# EAGLE board 2313 with DRT (EAGLE 6.1), part 1 of 2
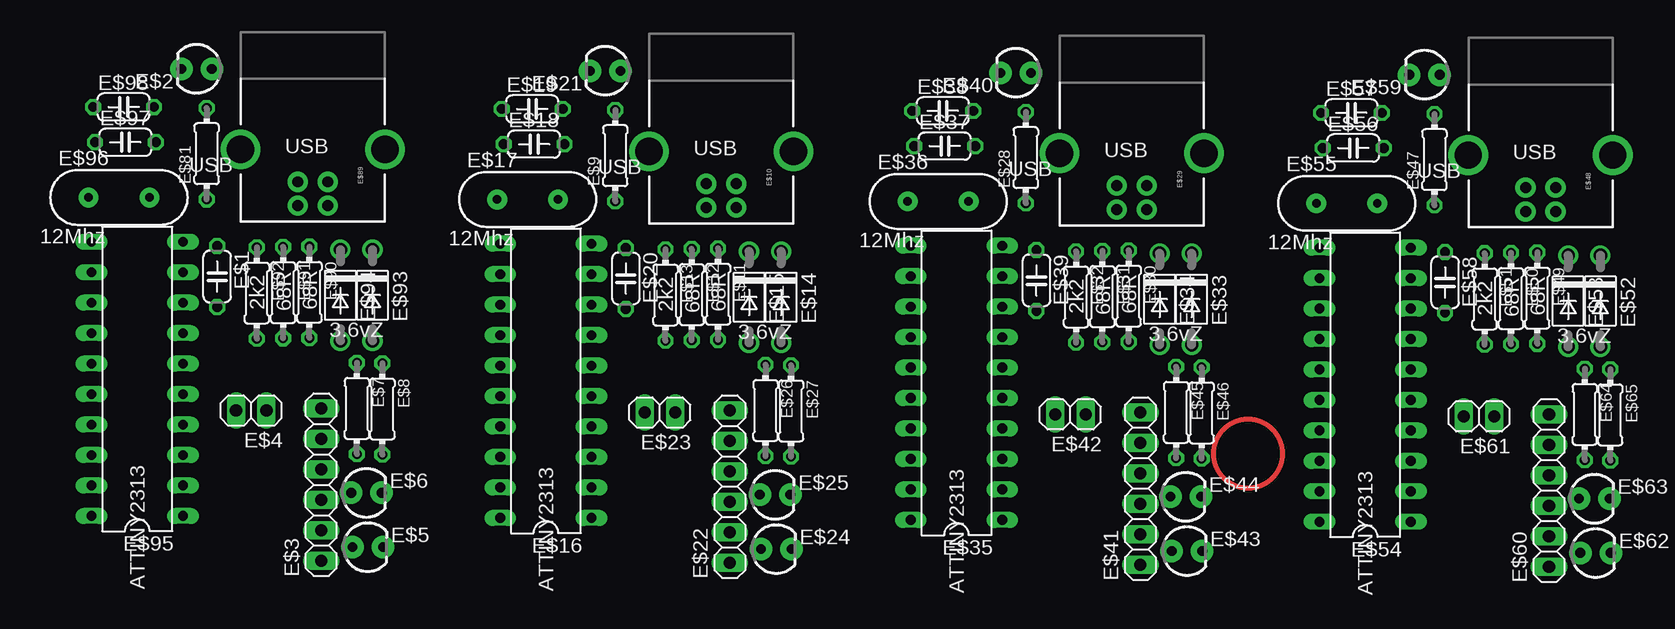
[diagram p0: board, top side]
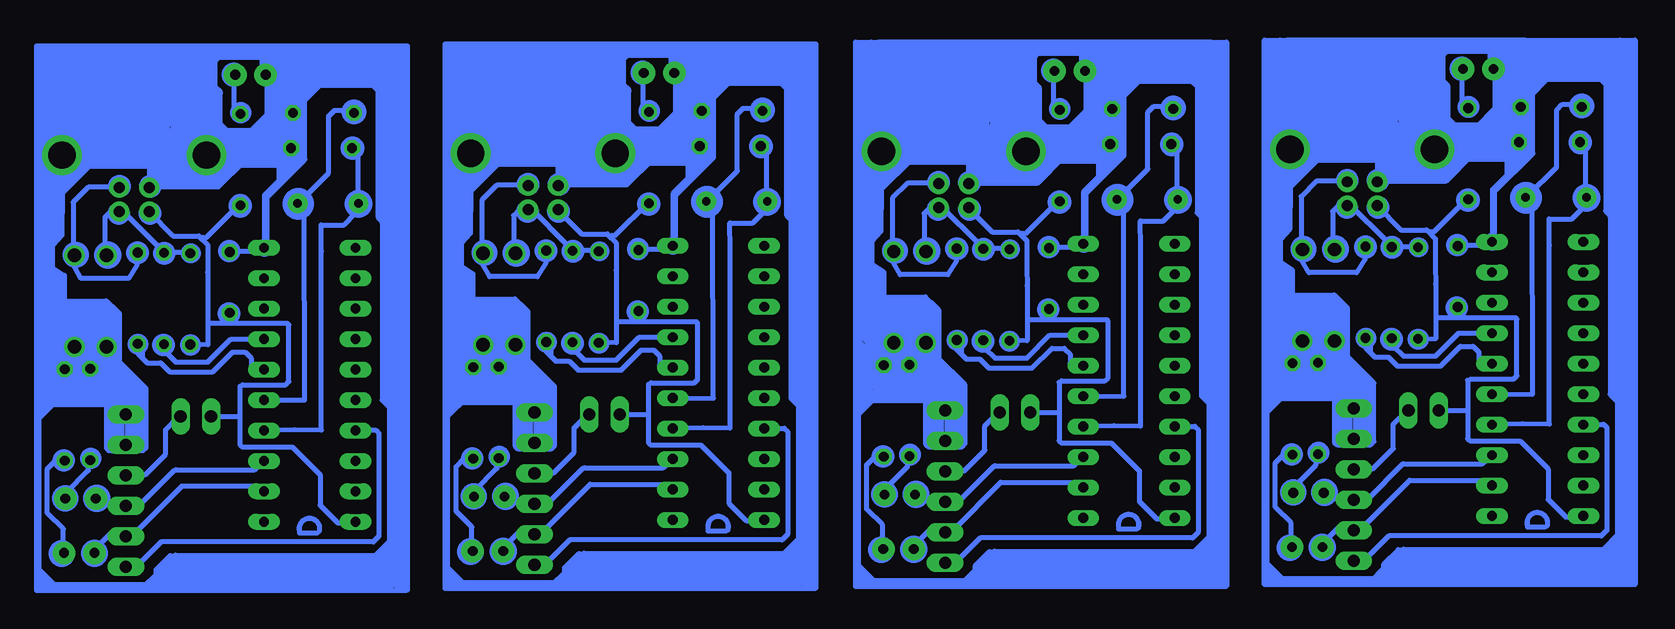
[diagram p1: board, bottom side, seen from below]

No outline drawn. Coordinates in mm, seen from the top.
Copper layers (1*16): Top 0.035mm / dielectric 1.5mm / Bottom 0.035mm
Design rules: minimum track width 10mil, minimum drill 24mil, track to track 8mil, track to pad 8mil, pad to pad 8mil, via to via 8mil, smd to smd 8mil, copper to edge 40mil, drill to drill 8mil, minimum pad ring 10mil, minimum via ring 8mil, stop-mask expansion 4mil, vias tented up to drill 0mil, thermal gap 10mil

## Footprints (pad centres in the part's own frame; a part is rotated, then mirrored left to right if it is on the bottom)
C050-024X044 = drill 0.813 octagon: 1 -2.54,0; 2 2.54,0
LED3MM = drill 0.813 pad 1.88: A -1.27,0; K 1.27,0
1X06 = drill 1.016 long: 1 -6.35,0; 2 -3.81,0; 3 -1.27,0; 4 1.27,0; 5 3.81,0; 6 6.35,0
1X02 = drill 1.016 long: 1 -1.27,0; 2 1.27,0
0204/7 = drill 0.813 octagon: 1 -3.81,0; 2 3.81,0
USB-B-PTH = drill 0.914 pad 1.676: D+ 0,1.25; D- 1.981,1.25; GND 0,-1.25; VBUS 1.981,-1.25 | drill 2.286: S1 -2.718,-6.02; S2 -2.718,6.02
DO41-7 = drill 1.118: A 3.81,0; C -3.81,0
DIL20 = drill 0.813 long: 1 -11.43,-3.81; 2 -8.89,-3.81; 3 -6.35,-3.81; 4 -3.81,-3.81; 5 -1.27,-3.81; 6 1.27,-3.81; 7 3.81,-3.81; 8 6.35,-3.81; 9 8.89,-3.81; 10 11.43,-3.81; 11 11.43,3.81; 12 8.89,3.81; 13 6.35,3.81; 14 3.81,3.81; 15 1.27,3.81; 16 -1.27,3.81; 17 -3.81,3.81; 18 -6.35,3.81; 19 -8.89,3.81; 20 -11.43,3.81
HC49US = drill 0.7 pad 1.651: 1 -2.54,0; 2 2.54,0

## Placement (x,y rotation side)
E$1  [C050-024X044]  16.87,27.66 270 top
E$2  [LED3MM]  15.15,44.98 180 top
E$3  [1X06]  25.53,10.31 90 top
E$4  [1X02]  19.7,16.49 180 top
E$5  [LED3MM]  29.41,5.1 0 top
E$6  [LED3MM]  29.3,9.63 0 top
E$7  68Rd-  [0204/7]  28.51,16.66 270 top
E$8  68Rd-  [0204/7]  30.63,16.62 270 top
E$9  2K2  [0204/7]  50.04,37.74 90 top
E$10  [USB-B-PTH]  58.87,35.39 270 top
E$11  68RD+  [0204/7]  58.6,26.19 270 top
E$12  68Rd-  [0204/7]  56.41,26.16 270 top
E$13  2K2  [0204/7]  54.22,26.12 270 top
E$14  [DO41-7]  63.86,25.94 270 top
E$15  [DO41-7]  61.18,25.94 270 top
E$16  [DIL20]  44.26,18.96 90 top
E$17  [HC49US]  42.73,34.09 0 top
E$18  [C050-024X044]  43.27,38.7 0 top
E$19  [C050-024X044]  43.12,41.64 0 top
E$20  [C050-024X044]  50.92,27.5 270 top
E$21  [LED3MM]  49.2,44.81 180 top
E$22  [1X06]  59.58,10.14 90 top
E$23  [1X02]  53.76,16.33 180 top
E$24  [LED3MM]  63.46,4.94 0 top
E$25  [LED3MM]  63.36,9.47 0 top
E$26  68Rd-  [0204/7]  62.56,16.49 270 top
E$27  68Rd-  [0204/7]  64.69,16.45 270 top
E$28  2K2  [0204/7]  84.26,37.58 90 top
E$29  [USB-B-PTH]  93.09,35.23 270 top
E$30  68RD+  [0204/7]  92.82,26.02 270 top
E$31  68Rd-  [0204/7]  90.63,25.99 270 top
E$32  2K2  [0204/7]  88.44,25.96 270 top
E$33  [DO41-7]  98.08,25.77 270 top
E$34  [DO41-7]  95.4,25.77 270 top
E$35  [DIL20]  78.47,18.8 90 top
E$36  [HC49US]  76.95,33.93 0 top
E$37  [C050-024X044]  77.49,38.54 0 top
E$38  [C050-024X044]  77.33,41.48 0 top
E$39  [C050-024X044]  85.14,27.34 270 top
E$40  [LED3MM]  83.42,44.65 180 top
E$41  [1X06]  93.8,9.98 90 top
E$42  [1X02]  87.97,16.16 180 top
E$43  [LED3MM]  97.68,4.78 0 top
E$44  [LED3MM]  97.57,9.31 0 top
E$45  68Rd-  [0204/7]  96.78,16.33 270 top
E$46  68Rd-  [0204/7]  98.9,16.29 270 top
E$47  2K2  [0204/7]  118.31,37.41 90 top
E$48  [USB-B-PTH]  127.14,35.07 270 top
E$49  68RD+  [0204/7]  126.87,25.86 270 top
E$50  68Rd-  [0204/7]  124.68,25.83 270 top
E$51  2K2  [0204/7]  122.49,25.8 270 top
E$52  [DO41-7]  132.13,25.61 270 top
E$53  [DO41-7]  129.45,25.61 270 top
E$54  [DIL20]  112.53,18.64 90 top
E$55  [HC49US]  111,33.76 0 top
E$56  [C050-024X044]  111.54,38.38 0 top
E$57  [C050-024X044]  111.39,41.31 0 top
E$58  [C050-024X044]  119.19,27.17 270 top
E$59  [LED3MM]  117.47,44.49 180 top
E$60  [1X06]  127.85,9.82 90 top
E$61  [1X02]  122.03,16 180 top
E$62  [LED3MM]  131.73,4.61 0 top
E$63  [LED3MM]  131.63,9.14 0 top
E$64  68Rd-  [0204/7]  130.83,16.17 270 top
E$65  68Rd-  [0204/7]  132.96,16.13 270 top
E$81  2K2  [0204/7]  15.99,37.9 90 top
E$89  [USB-B-PTH]  24.82,35.56 270 top
E$90  68RD+  [0204/7]  24.55,26.35 270 top
E$91  68Rd-  [0204/7]  22.36,26.32 270 top
E$92  2K2  [0204/7]  20.17,26.29 270 top
E$93  [DO41-7]  29.81,26.1 270 top
E$94  [DO41-7]  27.13,26.1 270 top
E$95  [DIL20]  10.21,19.13 90 top
E$96  [HC49US]  8.68,34.25 0 top
E$97  [C050-024X044]  9.22,38.87 0 top
E$98  [C050-024X044]  9.06,41.8 0 top

## Library data of the parts
E$1 E$7-E$9 E$11-E$13 E$18-E$20 E$26-E$28 E$30-E$32 E$37-E$39 E$45-E$47 E$49-E$51 E$56-E$58 E$64 E$65 E$81 E$90-E$92 E$97 E$98 = rcl
E$2 E$5 E$6 E$21 E$24 E$25 E$40 E$43 E$44 E$59 E$62 E$63 = SparkFun-LED
E$3 E$4 E$22 E$23 E$41 E$42 E$60 E$61 = pinhead
E$10 E$29 E$48 E$89 = SparkFun-Connectors
E$14 E$15 E$33 E$34 E$52 E$53 E$93 E$94 = ref-packages-longpad
E$16 E$35 E$54 E$95 = 40xx
E$17 E$36 E$55 E$96 = SparkFun-FreqCtrl

## Nets
S$133: E$16.5
S$185: E$95.5
S$274: E$35.5
S$402: E$54.5

## Tracks (layer width: path | path; a pad name or v marks a point on that pad's centre or on a via)
S$1
  Bottom 0.406: 22.23,22.41 22.23,21.88 21.37,21.02 18.7,21.02 16.79,22.93 14.02,22.93 13.98,22.9
S$2
  Bottom 0.406: 24.52,22.48 24.52,21.7 23.77,20.95 22.64,20.95 21.89,20.2 18.29,20.2 16.64,21.85 15.59,21.85 15.1,21.36 15.1,20.61 14.88,20.38 14.13,20.38 14.05,20.46
S$3
  Bottom 0.406: 24.18,21.98 24.18,21.35
S$4
  Bottom 0.406: 12.04,24.22 18.61,24.22 18.65,24.16
S$5
  Bottom 0.406: 15.81,19.12 12.21,19.12 11.95,19.39 11.95,24.12 12.03,24.21
S$6
  Bottom 0.406: 15.82,13.94 11.66,13.94 9.34,11.62 9.34,9.07 7.88,7.62 6.53,7.62 6.37,7.78
S$7
  Bottom 0.406: 16.04,19.03 16.04,14.12 15.93,14.02
S$8
  Bottom 0.406: 16.91,25.16 16.91,24.32
S$9
  Bottom 0.406: 16.97,30.22 16.72,30.22
S$10
  Bottom 0.406: 16.75,30.29 14.37,30.29 13.96,30.69 13.96,34.93 11.08,37.81
S$11
  Bottom 0.406: 19.09,31.41 18.83,31.41 15.99,34.25
S$12
  Bottom 0.406: 16.53,45.11 16.53,42.26 15.97,41.7
S$13
  Bottom 0.406: 13.79,45 13.79,39.71 15.93,37.57
S$14
  Bottom 0.406: 32.92,22.36 32.92,46.17 31.68,47.4
S$15
  Bottom 0.406: 26.55,21.95 26.55,20.98 27.36,20.17 31.61,20.17 32.93,21.49 32.95,23.65 32.93,23.65
S$16
  Bottom 0.406: 29.08,21.96 27.94,21.96 27.87,21.89
S$17
  Bottom 0.406: 29.08,21.64 27.55,21.64 27.53,21.66
S$18
  Bottom 0.406: 30.08,21.28 27.15,21.28 27.11,21.31
S$19
  Bottom 0.406: 26.75,21.19 26.75,21.17 27.51,20.41
S$20
  Bottom 0.406: 27.09,21.02 30.18,21.02 30.64,21.48
S$21
  Bottom 0.406: 27.38,20.75 30.35,20.75 30.93,21.33
S$22
  Bottom 0.406: 27.6,20.46 30.51,20.46 31.14,21.09
S$23
  Bottom 0.406: 30.58,20.34 31.23,20.34 32.62,21.73 32.16,21.73 31.02,20.59 31.02,21.51 30.78,21.75 30.8,21.75 31.32,21.22 31.32,21.51 30.87,21.96 31.03,21.96 31.54,21.46 32.08,21.46 32.64,22.02 31.94,22.02 31.56,21.64 31.92,21.64 32.64,22.36 32.64,22.63 32.7,22.69 32.39,22.69 31.54,21.84 | 31.54,21.84 | 31.54,21.84 30.66,22.72 | 30.66,22.72 | 30.66,22.72 30,23.37 32.57,23.37 32.66,23.46 32.66,22.98 32.68,22.96 30.6,22.96 30.55,23.01 31.83,23.01 32.21,22.63 31.65,22.63 31.49,22.8 31.14,22.8 31.07,22.72 31.11,22.72 31.5,22.32 31.61,22.32 31.63,22.31 31.63,22.34 31.78,22.49
S$24
  Bottom 0.406: 26.53,21.22 26.53,23.19 26.79,23.45 29.97,23.45 30.13,23.61 30.13,24.53 29.99,24.68 29.99,24.5 29.97,24.48 29.97,23.3 29.8,23.14 27.47,23.14 27.36,23.03 29.8,23.03 29.84,22.99 28.81,22.99 28.68,22.87 28.2,22.87 28.11,22.78 28.72,22.78 28.77,22.72 28.59,22.72 28.47,22.6 28.3,22.6 28.29,22.61 28.3,22.61 28.39,22.52 28.79,22.52 28.81,22.51 28.18,22.51 28.16,22.52 28.14,22.52 28.11,22.49
S$25
  Bottom 0.406: 30.44,23.27 30.44,24.74 30.18,25 30.97,25.79 30.78,25.79 29.8,24.81 30.29,24.81 30.82,25.34 30.82,25.41 31.12,25.71 31.12,25.3 31,25.19 31,24.77 30.67,24.43 30.67,25.3 30.97,25.6 30.97,25.07 30.78,24.89 30.78,23.8 | 30.78,23.46 30.78,23.8 | 30.78,23.8 31,24.02 31,24.7 31.3,25 31.3,23.76 31.08,23.54 31.08,24.25 31.04,24.29
  Bottom 1.016: 31.04,24.29 31.04,24.25 31.68,23.61 32.39,23.61 32.39,29.05 | 32.39,36.11 32.39,29.05 | 32.39,29.05 31.23,27.89 31.23,24.32 31.15,24.25 31.6,24.25 31.64,24.21 31.64,28.04 31.9,28.3 31.9,31.27 31.34,31.83 31.34,35.47 30.89,35.92 31.34,35.92 32.5,37.08 32.5,36.29 31.83,35.62 31.83,35.73 31.23,36.33 30.14,36.33 28.83,37.64 23.24,37.64 23.05,37.46 23.05,36.56 22.72,36.22 18.11,36.22 14.24,40.08 14.24,40.68 14.13,40.8 14.13,40.72 14.84,40.01 17.2,40.01 17.95,40.76 17.95,43.46 18.37,43.87 18.37,46.24 17.88,46.73 14.02,46.73 13.9,46.61 13.9,45.04 13.87,45 13.79,45 13.42,44.62 13.42,39.74 14.73,38.43 12.55,38.43 | 11.73,38.43 12.55,38.43 | 12.55,38.43 13.23,39.11 13.23,39.26 12.48,40.01 12.48,44.96 13.15,45.64 13.15,46.5 13.53,46.88
S$26
  Bottom 1.016: 16.9,37.38 16.9,39.11 18.18,40.38 19.71,40.38 20.8,39.3 20.8,37.31 19.9,36.41 21.1,36.41 21.74,37.04 21.74,39.9 20.43,41.21 20.43,40.38 21.25,39.56 21.25,39.82 20.17,40.91 18.25,40.91 18.22,40.95 18.22,41.43 18.48,41.7 20.92,41.7 21.33,41.28 21.33,37.91 22.38,36.86 22.38,40.83 21.55,41.66 19.6,41.66 18.59,42.67 18.59,46.88 18.4,47.06 31.15,47.06 32.47,45.75 32.47,37.42 32.39,37.34 32.32,37.34 31.49,36.52 30.29,36.52 29.2,37.61 29.2,39.07 29.95,39.82 31.57,39.82 32.24,39.15
S$27
  Bottom 1.016: 28.72,38.24 22.68,38.24 22.6,38.32
S$28
  Bottom 1.016: 28.79,38.88 23.32,38.88 23.2,38.99 23.2,41.02 22.27,41.96 19.9,41.96 19.27,42.6 19.27,46.31 19.3,46.35 30.85,46.35 31.87,45.34 31.87,40.5 29.58,40.5 28.83,39.75 23.32,39.75 23.24,39.82
S$29
  Bottom 1.016: 29.69,40.35 22.57,40.35 22.34,40.57
S$30
  Bottom 1.016: 31.72,41.13 23.62,41.13
S$31
  Bottom 1.016: 31.57,41.85 22.08,41.85 22.04,41.81
S$32
  Bottom 1.016: 31.68,42.56 19.79,42.56 19.72,42.63
S$33
  Bottom 1.016: 31.72,43.27 19.38,43.27 19.23,43.42
S$34
  Bottom 1.016: 32.13,44.25 19.53,44.25 19.38,44.1
S$35
  Bottom 1.016: 31.72,45 19.94,45 19.72,44.77
S$36
  Bottom 1.016: 31.19,45.56 19.27,45.56 19.19,45.49
S$37
  Bottom 1.016: 16.75,39.22 14.28,39.22 14.2,39.15
S$38
  Bottom 1.016: 12.31,46.01 12.64,46.01 12.47,46.17
S$39
  Bottom 0.406: 30.92,26.12 27.17,26.12 26.08,25.03 26.08,20.73 26.68,20.13 31.52,20.13 32.74,21.36
S$40
  Bottom 0.406: 26.83,20.32 26.83,20.47 26.42,20.89 26.42,21.57 26.34,21.64 26.34,24.87 27.33,25.86 30.3,25.86 30.45,26.02 30.32,26.02 29.72,25.42 29.72,25.32 29.59,25.19 29.59,24.64 29.44,24.48 29.44,23.81 29.39,23.75 29.31,23.75 29.25,23.7 26.75,23.7 26.73,23.68 26.73,24.82 26.68,24.87 26.75,24.87 27.48,25.6 29.39,25.6 29.59,25.39 29.59,24.27 29.25,23.94 27.07,23.94 26.94,24.07 26.94,24.56 27.77,25.39 29.25,25.39 29.33,25.32 29.33,24.41 29.28,24.35 29.05,24.35 28.94,24.25 27.38,24.25 27.3,24.33 27.3,24.14 27.2,24.14 27.15,24.09 27.15,24.33 27.46,24.64 27.46,24.82 27.8,25.16 27.85,25.16 27.93,25.24 28.16,25.24 28.21,25.19 29.12,25.19 29.2,25.11 29.2,25.03 29.15,24.98 29.15,24.59 29.1,24.54 28.76,24.54 28.73,24.56 27.98,24.56 27.9,24.48 27.64,24.48 27.59,24.43 27.59,24.69 27.67,24.77 27.85,24.77 27.98,24.9 28.06,24.9 28.16,25 28.34,25 28.45,24.9 29.49,24.9 29.52,24.93 28.68,24.93 28.55,24.8 28.06,24.8 28,24.85 28,24.69
S$41
  Bottom 0.406: 6.46,15.34 4.71,15.34 4.44,15.07 4.44,6.49 4.9,6.03 22.6,6.03 24.68,3.94 26.57,3.94 26.69,3.83
S$42
  Bottom 0.406: 19.68,47.4 12.71,47.4 11.85,46.54 11.85,41.28 11.4,40.83
S$43
  Bottom 0.406: 12.22,42.78 12.22,45.86 12.15,45.94 12.15,46.46 12.82,47.14 13.01,47.14 13.16,47.29
S$44
  Bottom 0.406: 12.73,36.02 12.73,47.18 12.95,47.4 11.26,47.4 11.15,47.29 11.15,46.91 | 11.15,38.12 11.15,37.85 10.99,37.69 10.85,37.69 10.61,37.93 10.61,46.77 11.21,47.37 11.81,47.37 12.02,47.15 11.97,47.15 11.7,46.88 11.51,46.88 11.42,46.96 11.89,46.96 11.94,47.02 11.89,47.02 11.86,46.99 11.8,46.99 11.51,46.69 11.51,39.11 11.81,39.11 11.81,39.95 11.56,40.2 11.62,40.2 11.81,40.39 11.81,40.14 12.08,39.87 12.08,39.68 12.21,39.54 11.91,39.54 11.86,39.49 11.86,38.81 10.9,37.85 10.9,46.66 11.15,46.91 | 11.15,46.91 11.15,38.12 | 11.15,38.12 12.57,36.71 12.57,37.82 12.43,37.96 11.8,37.96 11.64,37.8 12.02,37.8 12.35,37.47 12.35,37.63 12.32,37.66 12.32,37.61 12.19,37.47 12.19,37.06 12.27,36.98 12.27,37.39 12.3,37.41 12.3,37.44
S$45
  Bottom 1.016: 11.39,38.36 11.77,38.73 11.88,38.73 12.33,39.18
S$46
  Bottom 0.406: 6.18,34.27 6.18,38.36 6.63,38.82
S$47
  Bottom 0.406: 10.65,40.2 12.6,42.15
S$48
  Bottom 0.406: 15.67,39.52 15.67,39.75 13.35,42.07
S$49
  Bottom 0.406: 13.76,30.55 13.76,34.77 10.66,37.87
S$50
  Bottom 0.406: 26.67,13.79 26.67,20.82 28.14,20.82
S$51
  Bottom 0.406: 18.39,16.49 16.17,16.49 16.13,16.46
S$53
  Bottom 1.016: 11.77,40.76 11.66,40.66
S$54
  Bottom 0.406: 11.09,34.37 11.05,34.37 8.63,36.79 8.63,41.53 8.14,42.02 6.7,42.02 6.54,41.86
S$55
  Bottom 0.406: 26.67,9.1 24.38,9.1 21.45,12.03
S$56
  Bottom 0.406: 26.59,6.65 24.87,6.65 20.88,10.64
S$57
  Bottom 0.406: 32.86,1.99 2.11,1.99
S$58
  Bottom 0.406: 15.6,37.86 17.82,35.64 23.86,35.64
S$59
  Bottom 0.406: 10.79,42.19 10.79,42.71 9.39,44.12 4.96,44.12 4.54,43.69 4.54,33.12 3.88,32.47 2.57,32.47 2.31,32.73 2.31,46.38 3.13,47.2
S$60
  Bottom 0.406: 13.02,47.39 3.36,47.39 2.54,46.57
S$61
  Bottom 0.406: 31.88,35.34 31.88,31.02 32.15,30.74
S$62
  Bottom 0.406: 2.1,2.11 2.08,46.12 3.24,47.28 10.01,47.28 10.26,47.03
S$63
  Bottom 0.406: 3.67,33.46 3.67,33.13 2.15,31.61 2.15,32.07 2.42,32.34 2.5,32.34
S$64
  Bottom 0.406: 32.98,1.96 32.98,47.39 2.08,47.39 2.08,2
S$65
  Bottom 0.406: 21.41,4.93 4.66,4.9 3.52,6.04 3.52,18.21 3.56,18.25
S$66
  Bottom 0.406: 29.28,17.62 28.53,18.37 26.88,18.37 26.84,18.33 26.84,19.78 27,19.94 30.18,19.94 30.26,19.86
S$67
  Bottom 0.406: 4.17,32.65 4.17,17.85 2.13,15.8
S$68
  Bottom 0.406: 2.22,16.07 2.22,16.29 3.91,17.98 3.91,32.1 3.78,32.23 3.78,18.21 2.34,16.77 2.34,31.36 3.15,32.18 3.42,32.18 3.47,32.12 3.47,18.09 2.68,17.3 2.68,31.29 3.25,31.86 3.25,17.77 2.96,17.49 2.96,18.02 3.02,18.07 3.02,31.65 2.87,31.8
S$69
  Bottom 1.422: 2.74,32.17 2.74,46.76 2.69,46.8 2.69,34.22 3.7,33.21 3.7,46.22 3.4,46.52 10.26,46.52 10.39,46.65 10.39,44.02 10.55,43.87 10.55,43.88 9.74,44.69 4.68,44.69 4.38,44.39 4.38,45.16 4.63,45.41 9.99,45.41 10.15,45.57
S$70
  Bottom 1.422: 16.39,39.11 16.39,37.97 16.42,37.94 12.6,37.94 12.54,38
S$71
  Bottom 0.406: 32.74,43.39 32.74,21.94 32.95,21.73
S$72
  Bottom 1.27: 2.66,2.53 2.66,19.52 2.8,19.65 2.8,17.69 2.99,17.5 2.99,5.83 4.52,4.3 20.13,4.3 20.54,3.89 4.14,3.89 3.59,4.44 3.59,3.65 3.4,3.46 21.22,3.46 21.27,3.51
S$74
  Bottom 0.406: 24.61,2.3 24.04,2.3 23.02,3.33 23.02,3.7 21.84,4.88 4.75,4.88 3.39,6.24 3.39,2.3 23.78,2.3 23.85,2.38 23.59,2.38 22.68,3.29 22.68,3.7 21.77,4.61 20.93,4.61 20.89,4.65 20.89,4.54 21.12,4.31 21.73,4.31 22.45,3.59 22.45,3.37 23.13,2.68 21.65,4.16 21.65,3.86 22.94,2.57 3.65,2.57 3.46,2.38 21.08,2.38 21.92,3.21 22.22,2.91 21.84,2.91 21.8,2.87 22.14,2.87 22.18,2.83 22.41,2.83 22.41,2.87 21.69,2.87 21.35,3.21
S$75
  Bottom 0.406: 28.14,5.07 28.14,5.37 26.82,6.7
S$76
  Bottom 0.61: 30.09,18.1 29.04,19.15 27.73,19.15 27.63,19.25 31.73,19.25 32.25,19.77
S$77
  Bottom 0.61: 26.71,13.95 26.71,21.41
S$79
  Bottom 0.406: 20.9,10.67 14.19,10.67 13.91,10.39
S$80
  Bottom 0.406: 21.37,12.04 14.81,12.04 14.05,12.79
S$81
  Bottom 0.406: 32.66,45.06 32.66,47.22 32.62,47.26 32.47,47.26 32.35,47.14 32.51,47.14 32.7,46.95
S$82
  Bottom 0.406: 31.91,43.06 31.56,43.06 31.21,43.41
S$84
  Bottom 0.406: 26.89,13.63 24.12,13.63 23.85,13.9 23.85,18.78 26.21,21.14 26.21,20.68 24.23,18.71 24.23,14.01 24.31,13.94 24.31,18.37 25.83,19.89 25.87,19.89 26.02,20.04 26.02,19.62 24.61,18.22 24.99,18.22 25.98,19.2 25.9,19.2 24.46,17.76 24.84,17.76 25.98,18.9 25.98,18.45 25.6,18.07 25.11,18.07 24.92,17.88 25.11,17.88 | 25.11,17.88 25.14,17.88 25.37,17.65 26.17,17.65 26.25,17.73 25.71,17.73 | 25.64,17.73 24.61,17.73 24.54,17.8 24.57,17.8 24.73,17.65 24.92,17.65 25.03,17.54 25.6,17.54 25.94,17.88 25.9,17.88 25.87,17.91 25.07,17.91 24.65,17.5 24.65,17.23 24.57,17.16 24.57,14.01 24.69,13.9 25.71,13.9 25.83,14.01 25.83,17.61 25.71,17.73 | 25.71,17.73 25.64,17.73 | 25.64,17.73 25.41,17.5 25.41,14.12 25.14,14.12 25.11,14.09 25.11,17.69 | 25.11,17.88 25.11,17.69 | 25.11,17.69 24.77,17.35 24.77,14.24 24.95,14.05
S$85
  Bottom 0.406: 27.13,13.83 27.13,18.85 27.38,19.1
S$86
  Bottom 0.406: 26.04,13.65 26.06,13.65 | 26.06,13.65 26.97,13.65 27.11,13.79 | 26.06,13.65 26.06,25.04 26.67,25.65
S$87
  Bottom 0.406: 26.29,20.65 26.29,13.88 26.31,13.86
S$88
  Bottom 0.406: 24.78,11.58 26.58,11.58 26.71,11.45
S$89
  Bottom 0.406: 24.68,2.03 23.92,2.42
S$90
  Bottom 0.406: 9.42,6.86 arc-215 11.05,6.88
S$91
  Bottom 0.406: 24.8,2.3 28.46,2.3
S$92
  Bottom 0.406: 32.47,2.45 32.47,2.49 23.74,2.49
S$93
  Bottom 0.61: 29.63,17.81 28.68,18.76 27.24,18.76 27.11,18.89 27.11,19.51 27.24,19.64 31.53,19.64 32.54,20.66 32.54,20.85 32.64,20.95
S$94
  Bottom 0.61: 30.61,18.2 30.28,18.53 30.74,18.53 31,18.27
S$95
  Bottom 0.406: 25.94,2.34 25.94,2.3 32.51,2.3
S$96
  Bottom 0.61: 31.2,18.36 30.84,18.72
S$97
  Bottom 0.406: 26.78,13.86 26.78,13.78
S$98
  Bottom 0.61: 31.69,18.92 31.99,19.21 30.18,19.21 29.79,18.82 31.36,18.82 31.46,18.72
S$99
  Bottom 0.406: 26.7,14.05 26.7,14.09
S$100
  Bottom 0.406: 26.66,14.58 26.66,14.43
S$101
  Bottom 0.406: 26.63,13.59 26.63,13.67
S$102
  Bottom 0.406: 31.71,18.18 31.71,17.8 27.16,17.8 27.16,17.73 | 31.71,18.18 31.71,20.34 31.86,20.34 | 27.12,18.1 27.12,18.18 31.71,18.18
S$103
  Bottom 0.406: 26.78,17.5 26.78,17.46 32.13,17.46
S$104
  Bottom 0.406: 28.07,9.65 27.35,9.65 26.82,9.12
S$105
  Bottom 0.406: 30.51,9.71 30.51,10.13 28.66,11.97 28.66,12.74 28.5,12.89
S$106
  Bottom 0.406: 32.75,2.37 32.75,16.37 31.11,18
S$107
  Bottom 0.61: 32.64,2.39 32.61,2.36
S$108
  Bottom 0.406: 32.72,16.79 32.72,21.4 32.75,21.42
S$109
  Bottom 0.406: 32.46,16.95 32.46,21.21 32.41,21.27
S$110
  Bottom 0.406: 32.19,17.26 32.19,19.45
S$111
  Bottom 0.406: 31.88,17.68 31.88,20.87 31.9,20.9
S$112
  Bottom 0.406: 30.75,5.16 30.75,7.1 32.06,8.42 32.06,12.13 31.32,12.87 30.69,12.87 30.61,12.79
S$113
  Bottom 0.406: 24.8,11.62 23.93,11.62 22.22,13.33 22.22,15.37 21.04,16.55
S$114
  Bottom 0.406: 26.51,23.48 26.89,23.48 26.93,23.52
S$115
  Bottom 0.406: 9.59,6.75 11.07,6.75
S$116
  Bottom 0.406: 21.55,2.7 3.93,2.7 3.38,3.25 19.23,3.25 20.73,4.75
S$117
  Bottom 0.406: 30.79,2.2 31.25,2.2 32.7,3.66
S$118
  Bottom 0.406: 32.7,3.29 32.65,3.29 31.93,2.57
S$119
  Bottom 0.406: 32.06,2.57 32.24,2.57 32.65,2.98
S$120
  Bottom 0.406: 60.07,35.45 62.71,35.45 63.97,34.18 63.97,29.82 63.86,29.71
S$121
  Bottom 0.406: 60.09,33.39 60.84,33.42 61.33,32.92 61.33,29.94 61.18,29.79
S$122
  Bottom 0.406: 54.18,29.98 56.32,29.98 56.36,30.02 56.63,30.24 60.03,33.64
S$123
  Bottom 0.406: 58.66,29.82 58.66,28.91 59.35,27.82 63.32,27.82 63.86,28.75 63.86,29.56 63.78,29.63
S$124
  Bottom 0.406: 57.69,33.4 55.67,31.38 53.51,31.38 52.77,30.64 52.77,28.35 52.75,26.9 52.75,22.31 54.29,22.25
S$125
  Bottom 0.406: 57.59,35.46 57.59,37.07 57.87,37.34 62.51,37.34 64.89,34.96 64.93,31.44 65.72,30.58 65.72,28.75 64.71,28.07 64.71,25.69 63.75,24.72 63.75,22.25 63.98,22.02
S$126
  Bottom 0.406: 61.22,22.06 63.7,22.06 63.79,21.97
S$127
  Bottom 0.406: 63.01,21.92 62.92,22.02
S$128
  Bottom 0.406: 58.64,22.1 58.41,22.33
S$129
  Bottom 0.406: 58.66,21.91 58.66,21.62
S$130
  Bottom 0.406: 56.25,22.2 56.25,22.07
S$131
  Bottom 0.406: 58.23,21.82 58.23,21.18
S$132
  Bottom 0.406: 49.66,37.7 51.88,35.47 57.91,35.47
S$133
  Bottom 0.406: E$16.5 46.8,17.69 44.69,17.68 44.71,34.24 45.21,34.2
S$134
  Bottom 0.406: 26.02,35.61 28.66,35.61 29.92,34.35 29.92,29.99 29.81,29.87
S$135
  Bottom 0.406: 26.04,33.55 26.78,33.58 27.28,33.09 27.28,30.1 27.13,29.95
S$136
  Bottom 0.406: 20.13,30.14 22.27,30.14 22.31,30.18 22.58,30.4 25.98,33.8
S$137
  Bottom 0.406: 24.6,29.99 24.6,29.07 25.29,27.98 29.27,27.98 29.81,28.92 29.81,29.72 29.73,29.8
S$138
  Bottom 0.406: 23.63,33.56 21.61,31.54 19.45,31.54 18.72,30.81 18.72,28.51 18.7,27.06 18.7,22.47 20.24,22.41
S$139
  Bottom 0.406: 23.54,35.62 23.54,37.23 23.82,37.51 28.46,37.51 30.84,35.12 30.87,31.6 31.67,30.75 31.67,28.91 30.66,28.24 30.66,25.85 29.69,24.89 29.69,22.41 29.92,22.18
S$140
  Bottom 0.406: 48.04,15.18 45.53,15.24 43.29,15.19 43.29,30.11 43.31,32.3 41.4,32.3 40.45,33.25 40.45,33.88 40.13,34.2
S$141
  Bottom 0.406: 56.28,22.25 56.28,21.72 55.42,20.86 52.76,20.86 50.84,22.77 48.07,22.77 48.03,22.73
S$142
  Bottom 0.406: 58.57,22.32 58.57,21.53 57.82,20.78 56.7,20.78 55.94,20.03 52.34,20.03 50.69,21.68 49.64,21.68 49.16,21.2 49.16,20.44 48.93,20.22 48.18,20.22 48.11,20.29
S$143
  Bottom 0.406: 46.09,24.05 52.66,24.05 52.7,24
S$144
  Bottom 0.406: 49.86,18.96 46.26,18.96 46,19.22 46,23.95 46.09,24.04
S$145
  Bottom 0.406: 49.87,13.78 45.72,13.78 43.39,11.46 43.39,8.91 41.93,7.45 40.58,7.45 40.42,7.62
S$146
  Bottom 0.406: 50.09,18.86 50.09,13.96 49.98,13.85
S$147
  Bottom 0.406: 50.96,25 50.96,24.15
S$148
  Bottom 0.406: 51.02,30.06 50.77,30.06
S$149
  Bottom 0.406: 50.81,30.12 48.42,30.12 48.02,30.53 48.02,34.76 45.13,37.65
S$150
  Bottom 0.406: 53.15,31.25 52.88,31.25 50.04,34.09
S$151
  Bottom 0.406: 50.58,44.95 50.58,42.1 50.02,41.53
S$152
  Bottom 0.406: 47.84,44.84 47.84,39.54 49.98,37.41
S$153
  Bottom 0.406: 66.97,22.19 66.97,46.01 65.74,47.24
S$154
  Bottom 0.406: 60.61,21.79 60.61,20.82 61.42,20.01 65.66,20.01 66.98,21.32 67,23.49 66.98,23.49
S$155
  Bottom 0.406: 63.13,21.8 62,21.8 61.92,21.73
S$156
  Bottom 0.406: 63.13,21.48 61.6,21.48 61.58,21.49
S$157
  Bottom 0.406: 64.13,21.11 61.2,21.11 61.16,21.15
S$158
  Bottom 0.406: 60.8,21.02 60.8,21 61.56,20.25
S$159
  Bottom 0.406: 61.15,20.86 64.24,20.86 64.69,21.31
S$160
  Bottom 0.406: 61.44,20.59 64.4,20.59 64.98,21.17
S$161
  Bottom 0.406: 27.17,22.23 29.65,22.23 29.74,22.13
S$162
  Bottom 0.406: 28.96,22.09 28.87,22.18
S$163
  Bottom 0.406: 61.65,20.3 64.56,20.3 65.2,20.93
S$164
  Bottom 0.406: 64.64,20.17 65.29,20.17 66.68,21.57 66.21,21.57 65.07,20.43 65.07,21.35 64.83,21.58 64.85,21.58 65.38,21.06 65.38,21.35 64.92,21.8 65.09,21.8 65.59,21.29 66.14,21.29 66.7,21.85 65.99,21.85 65.61,21.48 65.97,21.48 66.7,22.2 66.7,22.47 66.75,22.52 66.44,22.52 65.59,21.67 | 65.59,21.67 | 65.59,21.67 64.71,22.56 | 64.71,22.56 | 64.71,22.56 64.06,23.21 66.62,23.21 66.71,23.3 66.71,22.81 66.73,22.8 64.65,22.8 64.6,22.85 65.88,22.85 66.26,22.47 65.7,22.47 65.54,22.63 65.2,22.63 65.12,22.56 65.16,22.56 65.56,22.16 65.67,22.16 65.68,22.14 65.68,22.18 65.83,22.32
S$165
  Bottom 0.406: 24.59,22.27 24.36,22.5
S$166
  Bottom 0.406: 60.59,21.06 60.59,23.03 60.84,23.28 64.02,23.28 64.18,23.45 64.18,24.37 64.04,24.51 64.04,24.33 64.02,24.31 64.02,23.14 63.86,22.98 61.53,22.98 61.42,22.87 63.86,22.87 63.89,22.83 62.86,22.83 62.74,22.7 62.25,22.7 62.16,22.61 62.77,22.61 62.83,22.56 62.65,22.56 62.52,22.43 62.36,22.43 62.34,22.45 62.36,22.45 62.45,22.36 62.85,22.36 62.86,22.34 62.23,22.34 62.21,22.36 62.2,22.36 62.16,22.32
S$167
  Bottom 0.406: 24.61,22.07 24.61,21.78
S$168
  Bottom 0.406: 22.2,22.36 22.2,22.23
S$169
  Bottom 1.016: 45.44,38.19 45.82,38.57 45.93,38.57 46.38,39.02
S$170
  Bottom 0.406: 64.5,23.11 64.5,24.57 64.23,24.84 65.02,25.62 64.83,25.62 63.86,24.65 64.34,24.65 64.87,25.17 64.87,25.25 65.17,25.55 65.17,25.14 65.06,25.02 65.06,24.61 64.72,24.27 64.72,25.14 65.02,25.43 65.02,24.91 64.83,24.72 64.83,23.63 | 64.83,23.3 64.83,23.63 | 64.83,23.63 65.06,23.86 65.06,24.54 65.36,24.84 65.36,23.6 65.13,23.37 65.13,24.09 65.09,24.12
  Bottom 1.016: 65.09,24.12 65.09,24.08 65.73,23.45 66.44,23.45 66.44,28.89 | 66.44,35.94 66.44,28.89 | 66.44,28.89 65.28,27.72 65.28,24.16 65.21,24.09 65.66,24.09 65.69,24.05 65.69,27.88 65.96,28.14 65.96,31.1 65.39,31.66 65.39,35.3 64.94,35.76 65.39,35.76 66.56,36.92 66.56,36.13 65.88,35.45 65.88,35.57 65.28,36.17 64.19,36.17 62.88,37.48 57.29,37.48 57.11,37.29 57.11,36.39 56.77,36.05 52.16,36.05 48.29,39.92 48.29,40.52 48.18,40.63 48.18,40.56 48.89,39.84 51.26,39.84 52.01,40.6 52.01,43.3 52.42,43.71 52.42,46.08 51.93,46.56 48.07,46.56 47.96,46.45 47.96,44.87 47.92,44.84 47.84,44.84 47.47,44.46 47.47,39.58 48.78,38.27 46.61,38.27 | 45.78,38.27 46.61,38.27 | 46.61,38.27 47.28,38.95 47.28,39.09 46.53,39.84 46.53,44.8 47.21,45.47 47.21,46.34 47.58,46.71
S$171
  Bottom 1.016: 50.96,37.22 50.96,38.95 52.23,40.22 53.77,40.22 54.86,39.13 54.86,37.14 53.96,36.24 55.16,36.24 55.79,36.88 55.79,39.73 54.48,41.05 54.48,40.22 55.31,39.4 55.31,39.66 54.22,40.75 52.31,40.75 52.27,40.78 52.27,41.27 52.53,41.53 54.97,41.53 55.38,41.12 55.38,37.74 56.43,36.69 56.43,40.67 55.61,41.5 53.66,41.5 52.64,42.51 52.64,46.71 52.46,46.9 65.21,46.9 66.52,45.59 66.52,37.26 66.44,37.18 66.37,37.18 65.55,36.35 64.34,36.35 63.26,37.44 63.26,38.91 64.01,39.66 65.62,39.66 66.3,38.98
S$172
  Bottom 1.016: 62.77,38.08 56.73,38.08 56.66,38.16
S$173
  Bottom 1.016: 62.84,38.72 57.37,38.72 57.26,38.83 57.26,40.86 56.32,41.8 53.96,41.8 53.32,42.43 53.32,46.15 53.36,46.19 64.91,46.19 65.92,45.17 65.92,40.33 63.63,40.33 62.88,39.58 57.37,39.58 57.29,39.66
S$174
  Bottom 1.016: 63.74,40.18 56.62,40.18 56.39,40.41
S$175
  Bottom 1.016: 65.77,40.97 57.67,40.97
S$176
  Bottom 1.016: 65.62,41.68 56.13,41.68 56.09,41.65
S$177
  Bottom 1.016: 65.73,42.4 53.84,42.4 53.77,42.47
S$178
  Bottom 1.016: 65.77,43.11 53.43,43.11 53.28,43.26
S$179
  Bottom 1.016: 66.18,44.09 53.58,44.09 53.43,43.94
S$180
  Bottom 1.016: 65.77,44.84 53.99,44.84 53.77,44.61
S$181
  Bottom 1.016: 65.25,45.4 53.32,45.4 53.24,45.32
S$182
  Bottom 1.016: 50.81,39.06 48.33,39.06 48.26,38.98
S$183
  Bottom 1.016: 46.37,45.84 46.69,45.84 46.53,46
S$184
  Bottom 1.016: 45.83,40.6 45.72,40.49
S$185
  Bottom 0.406: E$95.5 12.74,17.86 10.63,17.84 10.66,34.4 11.16,34.37
S$186
  Bottom 0.406: 13.99,15.35 11.47,15.4 9.23,15.36 9.23,30.27 9.25,32.46 7.35,32.46 6.39,33.41 6.39,34.05 6.08,34.37
S$187
  Bottom 0.406: 64.97,25.96 61.23,25.96 60.13,24.87 60.13,20.57 60.73,19.97 65.57,19.97 66.8,21.2
S$188
  Bottom 0.406: 60.89,20.15 60.89,20.31 60.47,20.73 60.47,21.4 60.39,21.48 60.39,24.71 61.38,25.7 64.35,25.7 64.51,25.86 64.38,25.86 63.78,25.26 63.78,25.15 63.65,25.02 63.65,24.48 63.49,24.32 63.49,23.64 63.44,23.59 63.36,23.59 63.31,23.54 60.81,23.54 60.78,23.51 60.78,24.66 60.73,24.71 60.81,24.71 61.54,25.44 63.44,25.44 63.65,25.23 63.65,24.11 63.31,23.77 61.12,23.77 60.99,23.9 60.99,24.4 61.82,25.23 63.31,25.23 63.39,25.15 63.39,24.24 63.33,24.19 63.1,24.19 63,24.09 61.43,24.09 61.35,24.16 61.35,23.98 61.25,23.98 61.2,23.93 61.2,24.16 61.51,24.48 61.51,24.66 61.85,25 61.9,25 61.98,25.08 62.21,25.08 62.27,25.02 63.18,25.02 63.26,24.95 63.26,24.87 63.2,24.82 63.2,24.43 63.15,24.37 62.81,24.37 62.79,24.4 62.03,24.4 61.95,24.32 61.69,24.32 61.64,24.27 61.64,24.53 61.72,24.61 61.9,24.61 62.03,24.74 62.11,24.74 62.21,24.84 62.4,24.84 62.5,24.74 63.54,24.74 63.57,24.76 62.73,24.76 62.6,24.63 62.11,24.63 62.06,24.68 62.06,24.53
S$189
  Bottom 0.406: 53.74,47.24 46.76,47.24 45.9,46.38 45.9,41.12 45.45,40.67
S$190
  Bottom 0.406: 46.27,42.62 46.27,45.7 46.2,45.77 46.2,46.3 46.87,46.98 47.06,46.98 47.21,47.12
S$191
  Bottom 0.406: 44.7,40.03 46.65,41.98
S$192
  Bottom 0.406: 49.72,39.36 49.72,39.58 47.4,41.91
S$193
  Bottom 0.406: 47.82,30.39 47.82,34.61 44.72,37.71
S$194
  Bottom 0.406: 60.72,13.62 60.72,20.66 62.19,20.66
S$195
  Bottom 0.406: 60.72,8.93 58.44,8.93 55.5,11.86
S$196
  Bottom 0.406: 60.64,6.49 58.92,6.49 54.93,10.48
S$197
  Bottom 0.406: 46.79,35.86 46.79,47.02 47.01,47.23 45.31,47.23 45.2,47.12 45.2,46.74 | 45.2,37.96 45.2,37.69 45.04,37.52 44.9,37.52 44.66,37.77 44.66,46.61 45.26,47.21 45.86,47.21 46.08,46.99 46.02,46.99 45.75,46.72 45.56,46.72 45.48,46.8 45.94,46.8 45.99,46.85 45.94,46.85 45.91,46.82 45.86,46.82 45.56,46.52 45.56,38.94 45.86,38.94 45.86,39.79 45.61,40.03 45.67,40.03 45.86,40.22 45.86,39.98 46.13,39.71 46.13,39.52 46.27,39.38 45.97,39.38 45.91,39.32 45.91,38.64 44.96,37.69 44.96,46.5 45.2,46.74 | 45.2,46.74 45.2,37.96 | 45.2,37.96 46.62,36.54 46.62,37.66 46.49,37.8 45.86,37.8 45.7,37.63 46.08,37.63 46.4,37.31 46.4,37.47 46.38,37.5 46.38,37.44 46.24,37.31 46.24,36.9 46.32,36.81 46.32,37.22 46.35,37.25 46.35,37.28
S$198
  Bottom 0.406: 40.23,34.1 40.23,38.2 40.69,38.65
S$199
  Bottom 0.406: 45.14,34.2 45.11,34.2 42.69,36.62 42.69,41.37 42.19,41.86 40.75,41.86 40.59,41.7
S$200
  Bottom 0.406: 44.85,42.02 44.85,42.55 43.44,43.95 39.02,43.95 38.59,43.53 38.59,32.96 37.94,32.3 36.63,32.3 36.36,32.57 36.36,46.21 37.18,47.03
S$201
  Bottom 0.406: 47.08,47.23 37.41,47.23 36.59,46.41
S$202
  Bottom 0.406: 65.93,35.17 65.93,30.85 66.2,30.58
S$203
  Bottom 0.406: 66.79,43.23 66.79,21.77 67,21.57
S$204
  Bottom 0.406: 36.16,1.94 36.13,45.96 37.29,47.12 44.06,47.12 44.31,46.87
S$205
  Bottom 0.406: 37.73,33.3 37.73,32.97 36.2,31.44 36.2,31.91 36.47,32.18 36.55,32.18
S$206
  Bottom 0.406: 67.03,1.79 67.03,47.22 36.13,47.22 36.13,1.84
S$207
  Bottom 0.406: 38.23,32.49 38.23,17.68 36.18,15.64
S$208
  Bottom 0.406: 36.28,15.9 36.28,16.13 37.96,17.82 37.96,31.94 37.83,32.07 37.83,18.04 36.39,16.6 36.39,31.2 37.2,32.02 37.47,32.02 37.53,31.96 37.53,17.93 36.73,17.13 36.73,31.12 37.3,31.69 37.3,17.61 37.02,17.32 37.02,17.85 37.07,17.91 37.07,31.48 36.92,31.64
S$209
  Bottom 1.422: 36.79,32.01 36.79,46.59 36.74,46.64 36.74,34.06 37.75,33.05 37.75,46.06 37.45,46.35 44.32,46.35 44.44,46.48 44.44,43.86 44.6,43.7 44.6,43.72 43.8,44.52 38.73,44.52 38.43,44.23 38.43,45 38.68,45.25 44.05,45.25 44.2,45.41
S$210
  Bottom 1.422: 50.44,38.95 50.44,37.8 50.47,37.78 46.65,37.78 46.59,37.83
S$211
  Bottom 0.406: 40.51,15.18 38.76,15.18 38.49,14.91 38.49,6.33 38.95,5.86 56.65,5.86 58.73,3.78 60.62,3.78 60.74,3.66
S$212
  Bottom 0.406: 66.91,1.83 36.16,1.83
S$213
  Bottom 0.406: 58.73,1.86 57.97,2.25
S$214
  Bottom 0.406: 55.46,4.77 38.72,4.73 37.58,5.87 37.58,18.05 37.62,18.09
S$215
  Bottom 0.406: 58.85,2.14 62.51,2.14
S$216
  Bottom 0.406: 63.33,17.46 62.59,18.21 60.94,18.21 60.9,18.17 60.9,19.62 61.05,19.78 64.24,19.78 64.32,19.7
S$217
  Bottom 1.27: 36.72,2.36 36.72,19.35 36.85,19.49 36.85,17.53 37.05,17.34 37.05,5.67 38.57,4.14 54.18,4.14 54.59,3.73 38.19,3.73 37.65,4.27 37.65,3.48 37.45,3.29 55.27,3.29 55.33,3.35
S$218
  Bottom 0.61: 66.69,2.23 66.66,2.2
S$219
  Bottom 0.61: 63.68,17.64 62.73,18.59 61.29,18.59 61.16,18.72 61.16,19.35 61.29,19.48 65.58,19.48 66.6,20.49 66.6,20.69 66.69,20.79
S$220
  Bottom 0.61: 64.67,18.04 64.34,18.36 64.8,18.36 65.06,18.1
S$221
  Bottom 0.61: 65.25,18.2 64.89,18.56
S$222
  Bottom 0.61: 65.75,18.76 66.04,19.05 64.24,19.05 63.85,18.66 65.42,18.66 65.52,18.56
S$223
  Bottom 0.61: 64.14,17.94 63.09,18.99 61.78,18.99 61.68,19.08 65.78,19.08 66.3,19.61
S$224
  Bottom 0.61: 60.77,13.78 60.77,21.24
S$225
  Bottom 0.406: 54.95,10.51 48.25,10.51 47.96,10.23
S$226
  Bottom 0.406: 55.42,11.88 48.86,11.88 48.1,12.63
S$227
  Bottom 0.406: 66.72,44.9 66.72,47.06 66.68,47.1 66.52,47.1 66.4,46.98 66.56,46.98 66.75,46.78
S$228
  Bottom 0.406: 65.97,42.9 65.61,42.9 65.26,43.25
S$229
  Bottom 0.406: 52.45,16.33 50.22,16.33 50.19,16.29
S$230
  Bottom 0.406: 58.83,11.42 60.64,11.42 60.77,11.29
S$231
  Bottom 0.406: 61.18,13.67 61.18,18.69 61.43,18.94
S$232
  Bottom 0.406: 60.09,13.49 60.11,13.49 | 60.11,13.49 61.02,13.49 61.16,13.62 | 60.11,13.49 60.11,24.87 60.73,25.49
S$233
  Bottom 0.406: 60.34,20.49 60.34,13.71 60.36,13.69
S$234
  Bottom 0.406: 43.47,6.7 arc-215 45.1,6.71
S$235
  Bottom 0.406: 66.53,2.29 66.53,2.33 57.8,2.33
S$236
  Bottom 0.406: 60,2.18 60,2.14 66.56,2.14
S$237
  Bottom 0.406: 60.83,13.7 60.83,13.62
S$238
  Bottom 0.406: 60.76,13.89 60.76,13.92
S$239
  Bottom 0.406: 60.72,14.42 60.72,14.27
S$240
  Bottom 0.406: 60.68,13.43 60.68,13.51
S$241
  Bottom 0.406: 65.77,18.02 65.77,17.64 61.21,17.64 61.21,17.56 | 65.77,18.02 65.77,20.18 65.92,20.18 | 61.17,17.94 61.17,18.02 65.77,18.02
S$242
  Bottom 0.406: 60.83,17.33 60.83,17.3 66.18,17.3
S$243
  Bottom 0.406: 58.67,2.14 58.09,2.14 57.07,3.16 57.07,3.54 55.89,4.72 38.8,4.72 37.44,6.08 37.44,2.14 57.83,2.14 57.91,2.21 57.64,2.21 56.73,3.12 56.73,3.54 55.82,4.45 54.98,4.45 54.94,4.49 54.94,4.38 55.17,4.15 55.78,4.15 56.5,3.43 56.5,3.2 57.19,2.52 57.18,2.52 55.7,4 55.7,3.69 56.99,2.4 37.7,2.4 37.52,2.21 55.14,2.21 55.97,3.05 | 55.97,3.05 | 55.97,3.05 56.27,2.75 55.89,2.75 55.86,2.71 56.2,2.71 56.23,2.67 56.46,2.67 56.46,2.71 55.74,2.71 55.4,3.05
S$244
  Bottom 0.406: 62.2,4.91 62.2,5.21 60.87,6.54
S$245
  Bottom 0.406: 62.12,9.49 61.4,9.49 60.87,8.96
S$246
  Bottom 0.406: 64.56,9.55 64.56,9.97 62.72,11.81 62.72,12.57 62.56,12.73
S$247
  Bottom 0.406: 66.8,2.2 66.8,16.2 65.17,17.84
S$248
  Bottom 0.406: 66.77,16.63 66.77,21.23 66.8,21.26
S$249
  Bottom 0.406: 66.51,16.79 66.51,21.05 66.46,21.1
S$250
  Bottom 0.406: 66.25,17.1 66.25,19.29
S$251
  Bottom 0.406: 65.93,17.52 65.93,20.71 65.96,20.73
S$252
  Bottom 0.406: 64.8,4.99 64.8,6.94 66.11,8.26 66.11,11.97 65.38,12.71 64.75,12.71 64.67,12.63
S$253
  Bottom 0.406: 58.86,11.46 57.98,11.46 56.27,13.17 56.27,15.21 55.1,16.39
S$254
  Bottom 0.406: 60.94,13.47 58.17,13.47 57.91,13.73 57.91,18.62 60.26,20.97 60.26,20.52 58.29,18.55 58.29,13.85 58.36,13.77 58.36,18.2 59.88,19.72 59.92,19.72 60.07,19.87 60.07,19.46 58.67,18.05 59.05,18.05 60.03,19.04 59.95,19.04 58.51,17.6 58.9,17.6 60.03,18.74 60.03,18.28 59.65,17.9 59.16,17.9 58.97,17.71 59.16,17.71 | 59.16,17.71 59.2,17.71 59.42,17.49 60.22,17.49 60.3,17.56 59.77,17.56 | 59.69,17.56 58.67,17.56 58.59,17.64 58.63,17.64 58.78,17.49 58.97,17.49 59.08,17.37 59.65,17.37 59.99,17.71 59.96,17.71 59.92,17.75 59.12,17.75 58.7,17.33 58.7,17.07 58.63,16.99 58.63,13.85 58.74,13.73 59.77,13.73 59.88,13.85 59.88,17.45 59.77,17.56 | 59.77,17.56 59.69,17.56 | 59.69,17.56 59.46,17.33 59.46,13.96 59.2,13.96 59.16,13.92 59.16,17.52 | 59.16,17.71 59.16,17.52 | 59.16,17.52 58.82,17.18 58.82,14.08 59.01,13.89
S$255
  Bottom 0.406: 60.56,23.32 60.94,23.32 60.98,23.36
S$256
  Bottom 0.406: 43.64,6.58 45.12,6.58
S$257
  Bottom 0.406: 55.6,2.54 37.98,2.54 37.43,3.09 53.28,3.09 54.78,4.59
S$258
  Bottom 0.406: 64.84,2.04 65.3,2.04 66.75,3.5
S$259
  Bottom 0.406: 66.75,3.13 66.71,3.13 65.98,2.4
S$260
  Bottom 0.406: 66.11,2.4 66.3,2.4 66.71,2.81
S$261
  Bottom 0.406: 94.29,35.28 96.93,35.28 98.19,34.02 98.19,29.66 98.08,29.55
S$262
  Bottom 0.406: 94.3,33.23 95.05,33.26 95.55,32.76 95.55,29.78 95.4,29.62
S$263
  Bottom 0.406: 88.4,29.82 90.54,29.82 90.58,29.85 90.84,30.07 94.25,33.48
S$264
  Bottom 0.406: 92.87,29.66 92.87,28.74 93.56,27.66 97.54,27.66 98.08,28.59 98.08,29.39 98,29.47
S$265
  Bottom 0.406: 91.9,33.23 89.88,31.21 87.72,31.21 86.99,30.48 86.99,28.19 86.97,26.73 86.97,22.15 88.5,22.08
S$266
  Bottom 0.406: 91.81,35.3 91.81,36.9 92.09,37.18 96.72,37.18 99.11,34.79 99.14,31.28 99.94,30.42 99.94,28.58 98.93,27.91 98.93,25.52 97.96,24.56 97.96,22.08 98.19,21.85
S$267
  Bottom 0.406: 95.44,21.9 97.92,21.9 98.01,21.81
S$268
  Bottom 0.406: 97.23,21.76 97.14,21.85
S$269
  Bottom 0.406: 92.86,21.94 92.63,22.17
S$270
  Bottom 0.406: 92.88,21.75 92.88,21.46
S$271
  Bottom 0.406: 90.47,22.03 90.47,21.9
S$272
  Bottom 0.406: 92.44,21.66 92.44,21.02
S$273
  Bottom 0.406: 83.87,37.53 86.09,35.31 92.13,35.31
S$274
  Bottom 0.406: E$35.5 81.02,17.53 78.9,17.51 78.93,34.08 79.43,34.04
S$275
  Bottom 0.406: 82.26,15.02 79.75,15.07 77.5,15.03 77.5,29.95 77.52,32.13 75.62,32.13 74.67,33.09 74.67,33.72 74.35,34.04
S$276
  Bottom 0.406: 90.5,22.08 90.5,21.56 89.64,20.69 86.97,20.69 85.06,22.61 82.28,22.61 82.25,22.57
S$277
  Bottom 0.406: 92.78,22.16 92.78,21.37 92.03,20.62 90.91,20.62 90.16,19.87 86.56,19.87 84.91,21.52 83.86,21.52 83.37,21.03 83.37,20.28 83.15,20.06 82.4,20.06 82.32,20.13
S$278
  Bottom 0.406: 80.31,23.89 86.88,23.89 86.92,23.83
S$279
  Bottom 0.406: 84.08,18.79 80.48,18.79 80.22,19.06 80.22,23.79 80.3,23.88
S$280
  Bottom 0.406: 84.09,13.62 79.93,13.62 77.61,11.29 77.61,8.75 76.15,7.29 74.8,7.29 74.64,7.45
S$281
  Bottom 0.406: 84.31,18.7 84.31,13.8 84.2,13.69
S$282
  Bottom 0.406: 85.18,24.83 85.18,23.99
S$283
  Bottom 0.406: 85.24,29.9 84.99,29.9
S$284
  Bottom 0.406: 85.02,29.96 82.64,29.96 82.23,30.36 82.23,34.6 79.35,37.48
S$285
  Bottom 0.406: 87.36,31.09 87.09,31.09 84.26,33.92
S$286
  Bottom 0.406: 84.8,44.79 84.8,41.93 84.23,41.37
S$287
  Bottom 0.406: 82.06,44.67 82.06,39.38 84.2,37.24
S$288
  Bottom 0.406: 101.19,22.03 101.19,45.84 99.95,47.08
S$289
  Bottom 0.406: 94.82,21.63 94.82,20.66 95.63,19.84 99.88,19.84 101.19,21.16 101.22,23.32 101.19,23.32
S$290
  Bottom 0.406: 97.35,21.64 96.21,21.64 96.14,21.57
S$291
  Bottom 0.406: 97.35,21.31 95.81,21.31 95.8,21.33
S$292
  Bottom 0.406: 98.34,20.95 95.42,20.95 95.38,20.99
S$293
  Bottom 0.406: 95.02,20.86 95.02,20.84 95.78,20.08
S$294
  Bottom 0.406: 95.36,20.7 98.45,20.7 98.91,21.15
S$295
  Bottom 0.406: 95.65,20.43 98.62,20.43 99.19,21
S$296
  Bottom 0.406: 95.87,20.14 98.78,20.14 99.41,20.77
S$297
  Bottom 0.406: 98.85,20.01 99.5,20.01 100.89,21.4 100.42,21.4 99.28,20.26 99.28,21.18 99.05,21.42 99.07,21.42 99.59,20.9 99.59,21.18 99.14,21.64 99.3,21.64 99.81,21.13 100.35,21.13 100.91,21.69 100.21,21.69 99.83,21.31 100.19,21.31 100.91,22.04 100.91,22.31 100.97,22.36 100.66,22.36 99.81,21.51 98.92,22.4 | 98.92,22.4 | 98.92,22.4 98.27,23.05 100.84,23.05 100.93,23.14 100.93,22.65 100.95,22.63 98.87,22.63 98.81,22.69 100.1,22.69 100.48,22.31 99.92,22.31 99.75,22.47 99.41,22.47 99.34,22.4 99.38,22.4 99.77,22 99.88,22 99.9,21.98 99.9,22.02 100.05,22.16
S$298
  Bottom 0.406: 94.8,20.9 94.8,22.87 95.06,23.12 98.24,23.12 98.4,23.28 98.4,24.2 98.25,24.35 98.25,24.17 98.24,24.15 98.24,22.98 98.07,22.81 95.74,22.81 95.63,22.7 98.07,22.7 98.11,22.67 97.08,22.67 96.95,22.54 96.47,22.54 96.38,22.45 96.99,22.45 97.04,22.4 96.86,22.4 96.74,22.27 96.57,22.27 96.56,22.29 96.57,22.29 96.66,22.2 97.06,22.2 97.08,22.18 96.45,22.18 96.43,22.2 96.41,22.2 96.38,22.16
S$299
  Bottom 1.016: 79.66,38.03 80.03,38.41 80.15,38.41 80.6,38.86
S$300
  Bottom 0.406: 98.71,22.95 98.71,24.41 98.45,24.67 | 98.45,24.67 | 98.45,24.67 99.24,25.46 99.05,25.46 98.07,24.48 98.56,24.48 99.09,25.01 99.09,25.09 99.39,25.39 99.39,24.97 99.27,24.86 99.27,24.45 98.94,24.11 98.94,24.97 99.24,25.27 99.24,24.75 99.05,24.56 99.05,23.47 | 99.05,23.13 99.05,23.47 | 99.05,23.47 99.27,23.7 99.27,24.37 99.57,24.67 99.57,23.43 99.35,23.21 99.35,23.92 99.31,23.96
  Bottom 1.016: 99.31,23.96 99.31,23.92 99.95,23.28 100.66,23.28 100.66,28.72 | 100.66,35.78 100.66,28.72 | 100.66,28.72 99.5,27.56 99.5,24 99.42,23.92 99.87,23.92 99.91,23.88 99.91,27.71 100.17,27.97 100.17,30.94 99.61,31.5 99.61,35.14 99.16,35.59 99.61,35.59 100.77,36.76 100.77,35.97 100.1,35.29 100.1,35.41 99.5,36.01 98.41,36.01 97.1,37.32 91.51,37.32 91.32,37.13 91.32,36.23 90.98,35.89 86.38,35.89 82.51,39.76 82.51,40.36 82.4,40.47 82.4,40.4 83.11,39.68 85.47,39.68 86.22,40.43 86.22,43.13 86.64,43.55 86.64,45.91 86.15,46.4 82.28,46.4 82.17,46.29 82.17,44.71 82.14,44.67 82.06,44.67 81.69,44.3 81.69,39.42 83,38.11 80.82,38.11 | 80,38.11 80.82,38.11 | 80.82,38.11 81.5,38.78 81.5,38.93 80.75,39.68 80.75,44.64 81.42,45.31 81.42,46.17 81.8,46.55
S$301
  Bottom 1.016: 85.17,37.05 85.17,38.78 86.45,40.06 87.98,40.06 89.07,38.97 89.07,36.98 88.17,36.08 89.37,36.08 90.01,36.72 90.01,39.57 88.7,40.88 88.7,40.06 89.52,39.23 89.52,39.49 88.44,40.58 86.52,40.58 86.48,40.62 86.48,41.11 86.75,41.37 89.19,41.37 89.6,40.96 89.6,37.58 90.65,36.53 90.65,40.51 89.82,41.33 87.87,41.33 86.86,42.35 86.86,46.55 86.67,46.74 99.42,46.74 100.74,45.42 100.74,37.09 100.66,37.02 100.59,37.02 99.76,36.19 98.56,36.19 97.47,37.28 97.47,38.74 98.22,39.49 99.83,39.49 100.51,38.82
S$302
  Bottom 1.016: 96.98,37.92 90.95,37.92 90.87,37.99
S$303
  Bottom 1.016: 97.06,38.56 91.58,38.56 91.47,38.67 91.47,40.7 90.53,41.63 88.17,41.63 87.53,42.27 87.53,45.99 87.57,46.02 99.12,46.02 100.14,45.01 100.14,40.17 97.85,40.17 97.1,39.42 91.58,39.42 91.51,39.49
S$304
  Bottom 1.016: 97.96,40.02 90.83,40.02 90.61,40.24
S$305
  Bottom 1.016: 99.99,40.81 91.89,40.81
S$306
  Bottom 1.016: 99.84,41.52 90.35,41.52 90.31,41.48
S$307
  Bottom 1.016: 99.95,42.23 88.06,42.23 87.98,42.31
S$308
  Bottom 1.016: 99.99,42.95 87.65,42.95 87.5,43.1
S$309
  Bottom 1.016: 100.4,43.92 87.8,43.92 87.65,43.77
S$310
  Bottom 1.016: 99.99,44.67 88.21,44.67 87.98,44.45
S$311
  Bottom 1.016: 99.46,45.24 87.53,45.24 87.46,45.16
S$312
  Bottom 1.016: 85.02,38.89 82.55,38.89 82.47,38.82
S$313
  Bottom 1.016: 80.58,45.68 80.91,45.68 80.74,45.84
S$314
  Bottom 1.016: 80.04,40.44 79.93,40.33
S$315
  Bottom 0.406: 99.19,25.8 95.44,25.8 94.35,24.7 94.35,20.41 94.95,19.81 99.79,19.81 101.01,21.03
S$316
  Bottom 0.406: 95.1,19.99 95.1,20.15 94.69,20.56 94.69,21.24 94.61,21.32 94.61,24.55 95.6,25.54 98.56,25.54 98.72,25.69 98.59,25.69 97.99,25.09 97.99,24.99 97.86,24.86 97.86,24.31 97.71,24.16 97.71,23.48 97.65,23.43 97.58,23.43 97.52,23.38 95.02,23.38 95,23.35 95,24.5 94.95,24.55 95.02,24.55 95.75,25.28 97.65,25.28 97.86,25.07 97.86,23.95 97.52,23.61 95.34,23.61 95.21,23.74 95.21,24.24 96.04,25.07 97.52,25.07 97.6,24.99 97.6,24.08 97.55,24.03 97.32,24.03 97.21,23.92 95.65,23.92 95.57,24 95.57,23.82 95.47,23.82 95.42,23.77 95.42,24 95.73,24.31 95.73,24.5 96.07,24.83 96.12,24.83 96.2,24.91 96.43,24.91 96.48,24.86 97.39,24.86 97.47,24.78 97.47,24.7 97.42,24.65 97.42,24.26 97.37,24.21 97.03,24.21 97,24.23 96.25,24.23 96.17,24.16 95.91,24.16 95.86,24.11 95.86,24.37 95.94,24.44 96.12,24.44 96.25,24.57 96.33,24.57 96.43,24.68 96.61,24.68 96.72,24.57 97.76,24.57 97.78,24.6 96.95,24.6 96.82,24.47 96.33,24.47 96.27,24.52 96.27,24.37
S$317
  Bottom 0.406: 87.95,47.08 80.98,47.08 80.11,46.21 80.11,40.96 79.67,40.51
S$318
  Bottom 0.406: 80.49,42.46 80.49,45.54 80.42,45.61 80.42,46.14 81.09,46.81 81.28,46.81 81.43,46.96
S$319
  Bottom 0.406: 78.92,39.87 80.86,41.82
S$320
  Bottom 0.406: 83.94,39.19 83.94,39.42 81.61,41.75
S$321
  Bottom 0.406: 82.03,30.23 82.03,34.45 78.93,37.54
S$322
  Bottom 0.406: 94.94,13.46 94.94,20.5 96.41,20.5
S$323
  Bottom 0.406: 94.94,8.77 92.65,8.77 89.72,11.7
S$324
  Bottom 0.406: 94.86,6.33 93.14,6.33 89.15,10.32
S$325
  Bottom 0.406: 81,35.7 81,46.85 81.22,47.07 79.53,47.07 79.42,46.96 79.42,46.58 | 79.42,37.8 79.42,37.52 79.26,37.36 79.12,37.36 78.87,37.61 78.87,46.44 79.47,47.04 80.08,47.04 80.29,46.83 80.24,46.83 79.97,46.55 79.77,46.55 79.69,46.63 80.16,46.63 80.21,46.69 80.16,46.69 80.13,46.66 80.07,46.66 79.77,46.36 79.77,38.78 80.08,38.78 80.08,39.62 79.83,39.87 79.88,39.87 80.08,40.06 80.08,39.82 80.35,39.54 80.35,39.35 80.48,39.22 80.18,39.22 80.13,39.16 80.13,38.48 79.17,37.52 79.17,46.33 79.42,46.58 | 79.42,46.58 79.42,37.8 | 79.42,37.8 80.84,36.38 80.84,37.5 80.7,37.63 80.08,37.63 79.91,37.47 80.29,37.47 80.62,37.14 80.62,37.31 80.59,37.33 80.59,37.28 80.46,37.14 80.46,36.73 80.54,36.65 80.54,37.06 80.57,37.09 80.57,37.12
S$326
  Bottom 0.406: 74.44,33.94 74.44,38.03 74.9,38.49
S$327
  Bottom 0.406: 79.36,34.04 79.32,34.04 76.9,36.46 76.9,41.21 76.41,41.7 74.97,41.7 74.81,41.53
S$328
  Bottom 0.406: 79.06,41.86 79.06,42.38 77.66,43.79 73.23,43.79 72.81,43.37 72.81,32.8 72.15,32.14 70.84,32.14 70.58,32.4 70.58,46.05 71.4,46.87
S$329
  Bottom 0.406: 81.29,47.06 71.63,47.06 70.81,46.25
S$330
  Bottom 0.406: 100.14,35.01 100.14,30.69 100.42,30.41
S$331
  Bottom 0.406: 101.01,43.06 101.01,21.61 101.22,21.4
S$332
  Bottom 0.406: 70.37,1.78 70.35,45.79 71.5,46.95 78.28,46.95 78.53,46.7
S$333
  Bottom 0.406: 71.94,33.13 71.94,32.81 70.42,31.28 70.42,31.74 70.69,32.02 70.77,32.02
S$334
  Bottom 0.406: 101.25,1.63 101.25,47.06 70.35,47.06 70.35,1.68
S$335
  Bottom 0.406: 72.44,32.33 72.44,17.52 70.4,15.48
S$336
  Bottom 0.406: 70.49,15.74 70.49,15.97 72.18,17.65 72.18,31.78 72.05,31.91 72.05,17.88 70.61,16.44 70.61,31.04 71.42,31.85 71.69,31.85 71.74,31.8 71.74,17.77 70.95,16.97 70.95,30.96 71.52,31.53 71.52,17.45 71.23,17.16 71.23,17.69 71.29,17.75 71.29,31.32 71.14,31.47
S$337
  Bottom 1.422: 71.01,31.85 71.01,46.43 70.96,46.48 70.96,33.9 71.97,32.89 71.97,45.89 71.67,46.19 78.53,46.19 78.66,46.32 78.66,43.7 78.82,43.54 78.82,43.56 78.01,44.36 72.95,44.36 72.65,44.06 72.65,44.84 72.9,45.09 78.26,45.09 78.42,45.24
S$338
  Bottom 1.422: 84.66,38.79 84.66,37.64 84.69,37.62 80.87,37.62 80.81,37.67
S$339
  Bottom 0.406: 74.73,15.02 72.98,15.02 72.71,14.74 72.71,6.16 73.17,5.7 90.87,5.7 92.95,3.62 94.84,3.62 94.95,3.5
S$340
  Bottom 0.406: 101.13,1.66 70.38,1.66
S$341
  Bottom 0.406: 92.95,1.7 92.19,2.09
S$342
  Bottom 0.406: 89.67,4.61 72.93,4.57 71.79,5.71 71.79,17.89 71.83,17.93
S$343
  Bottom 0.406: 93.07,1.98 96.72,1.98
S$344
  Bottom 0.406: 97.55,17.3 96.8,18.04 95.15,18.04 95.11,18 95.11,19.46 95.27,19.61 98.45,19.61 98.53,19.54
S$345
  Bottom 1.27: 70.93,2.2 70.93,19.19 71.07,19.33 71.07,17.36 71.26,17.17 71.26,5.5 72.79,3.97 88.4,3.97 88.81,3.56 72.41,3.56 71.86,4.11 71.86,3.32 71.67,3.13 89.49,3.13 89.54,3.18
S$346
  Bottom 0.61: 100.91,2.07 100.88,2.03
S$347
  Bottom 0.61: 97.9,17.48 96.95,18.43 95.51,18.43 95.38,18.56 95.38,19.18 95.51,19.31 99.8,19.31 100.81,20.33 100.81,20.52 100.91,20.62
S$348
  Bottom 0.61: 98.88,17.87 98.55,18.2 99.01,18.2 99.27,17.94
S$349
  Bottom 0.61: 99.47,18.04 99.11,18.4
S$350
  Bottom 0.61: 99.96,18.59 100.26,18.89 98.45,18.89 98.06,18.5 99.63,18.5 99.73,18.4
S$351
  Bottom 0.61: 98.36,17.77 97.31,18.82 96,18.82 95.9,18.92 100,18.92 100.52,19.45
S$352
  Bottom 0.61: 94.98,13.62 94.98,21.08
S$353
  Bottom 0.406: 89.17,10.35 82.46,10.35 82.18,10.06
S$354
  Bottom 0.406: 89.64,11.71 83.08,11.71 82.32,12.47
S$355
  Bottom 0.406: 100.93,44.73 100.93,46.9 100.89,46.93 100.73,46.93 100.62,46.82 100.78,46.82 100.97,46.62
S$356
  Bottom 0.406: 100.18,42.73 99.83,42.73 99.48,43.09
S$357
  Bottom 0.406: 86.66,16.16 84.44,16.16 84.4,16.13
S$358
  Bottom 0.406: 93.05,11.25 94.85,11.25 94.98,11.12
S$359
  Bottom 0.406: 95.4,13.51 95.4,18.53 95.65,18.78
S$360
  Bottom 0.406: 94.31,13.32 94.33,13.32 | 94.33,13.32 95.24,13.32 95.38,13.46 | 94.33,13.32 94.33,24.71 94.94,25.32
S$361
  Bottom 0.406: 94.56,20.32 94.56,13.55 94.58,13.53
S$362
  Bottom 0.406: 77.69,6.54 arc-215 79.32,6.55
S$363
  Bottom 0.406: 100.74,2.13 100.74,2.17 92.01,2.17
S$364
  Bottom 0.406: 94.21,2.01 94.21,1.98 100.78,1.98
S$365
  Bottom 0.406: 95.05,13.53 95.05,13.46
S$366
  Bottom 0.406: 94.97,13.72 94.97,13.76
S$367
  Bottom 0.406: 94.93,14.25 94.93,14.1
S$368
  Bottom 0.406: 94.9,13.27 94.9,13.34
S$369
  Bottom 0.406: 99.98,17.85 99.98,17.47 95.43,17.47 95.43,17.4 | 99.98,17.85 99.98,20.01 100.13,20.01 | 95.39,17.78 95.39,17.85 99.98,17.85
S$370
  Bottom 0.406: 95.05,17.17 95.05,17.13 100.4,17.13
S$371
  Bottom 0.406: 92.88,1.98 92.31,1.98 91.29,3 91.29,3.38 90.11,4.55 73.02,4.55 71.66,5.92 71.66,1.98 92.05,1.98 92.12,2.05 91.85,2.05 90.94,2.96 90.94,3.38 90.03,4.29 89.2,4.29 89.16,4.33 89.16,4.21 89.39,3.98 90,3.98 90.72,3.26 90.72,3.04 91.4,2.35 89.92,3.83 89.92,3.53 91.21,2.24 71.92,2.24 71.73,2.05 89.35,2.05 90.19,2.88 | 90.19,2.88 | 90.19,2.88 90.49,2.58 90.11,2.58 90.07,2.54 90.41,2.54 90.45,2.51 90.68,2.51 90.68,2.54 89.96,2.54 89.62,2.88
S$372
  Bottom 0.406: 96.42,4.74 96.42,5.04 95.09,6.37
S$373
  Bottom 0.406: 96.34,9.33 95.62,9.33 95.09,8.8
S$374
  Bottom 0.406: 98.78,9.38 98.78,9.8 96.93,11.65 96.93,12.41 96.77,12.57
S$375
  Bottom 0.406: 101.02,2.04 101.02,16.04 99.38,17.67
S$376
  Bottom 0.406: 100.99,16.46 100.99,21.07 101.02,21.1
S$377
  Bottom 0.406: 100.73,16.62 100.73,20.89 100.67,20.94
S$378
  Bottom 0.406: 100.46,16.94 100.46,19.12
S$379
  Bottom 0.406: 100.15,17.36 100.15,20.54 100.17,20.57
S$380
  Bottom 0.406: 99.01,4.83 99.01,6.78 100.33,8.09 100.33,11.8 99.59,12.54 98.96,12.54 98.88,12.46
S$381
  Bottom 0.406: 93.07,11.3 92.19,11.3 90.49,13 90.49,15.05 89.31,16.22
S$382
  Bottom 0.406: 95.16,13.31 92.39,13.31 92.12,13.57 92.12,18.45 94.48,20.81 94.48,20.36 92.5,18.38 92.5,13.69 92.58,13.61 92.58,18.04 94.1,19.56 94.14,19.56 94.29,19.71 94.29,19.3 92.88,17.89 93.26,17.89 94.25,18.88 94.17,18.88 92.73,17.44 93.11,17.44 94.25,18.57 94.25,18.12 93.87,17.74 93.38,17.74 93.19,17.55 93.38,17.55 | 93.38,17.55 93.41,17.55 93.64,17.32 94.44,17.32 94.52,17.4 93.98,17.4 | 93.91,17.4 92.88,17.4 92.81,17.47 92.84,17.47 93,17.32 93.19,17.32 93.3,17.21 93.87,17.21 94.21,17.55 94.17,17.55 94.14,17.59 93.34,17.59 92.92,17.17 92.92,16.91 92.84,16.83 92.84,13.69 92.96,13.57 93.98,13.57 94.1,13.69 94.1,17.29 93.98,17.4 | 93.98,17.4 93.91,17.4 | 93.91,17.4 93.68,17.17 93.68,13.8 93.41,13.8 93.38,13.76 93.38,17.36 | 93.38,17.55 93.38,17.36 | 93.38,17.36 93.03,17.02 93.03,13.91 93.22,13.72
S$383
  Bottom 0.406: 94.78,23.16 95.16,23.16 95.2,23.2
S$384
  Bottom 0.406: 77.86,6.42 79.34,6.42
S$385
  Bottom 0.406: 89.81,2.38 72.19,2.38 71.65,2.92 87.5,2.92 89,4.42
S$386
  Bottom 0.406: 99.06,1.88 99.51,1.88 100.97,3.33
S$387
  Bottom 0.406: 100.97,2.97 100.92,2.97 100.19,2.24
S$388
  Bottom 0.406: 100.33,2.24 100.51,2.24 100.92,2.65
S$389
  Bottom 0.406: 128.34,35.12 130.98,35.12 132.24,33.86 132.24,29.5 132.13,29.38
S$390
  Bottom 0.406: 128.36,33.06 129.11,33.09 129.6,32.6 129.6,29.61 129.45,29.46
S$391
  Bottom 0.406: 122.45,29.65 124.59,29.65 124.63,29.69 124.9,29.91 128.3,33.31
S$392
  Bottom 0.406: 126.93,29.5 126.93,28.58 127.61,27.5 131.59,27.5 132.13,28.43 132.13,29.23 132.05,29.31
S$393
  Bottom 0.406: 125.95,33.07 123.94,31.05 121.78,31.05 121.04,30.32 121.04,28.02 121.02,26.57 121.02,21.98 122.56,21.92
S$394
  Bottom 0.406: 125.86,35.13 125.86,36.74 126.14,37.02 130.78,37.02 133.16,34.63 133.19,31.11 133.99,30.26 133.99,28.42 132.98,27.75 132.98,25.36 132.02,24.4 132.02,21.92 132.25,21.69
S$395
  Bottom 0.406: 129.49,21.74 131.97,21.74 132.06,21.64
S$396
  Bottom 0.406: 131.28,21.6 131.19,21.69
S$397
  Bottom 0.406: 126.91,21.78 126.68,22.01
S$398
  Bottom 0.406: 126.93,21.58 126.93,21.29
S$399
  Bottom 0.406: 124.52,21.87 124.52,21.74
S$400
  Bottom 0.406: 126.5,21.49 126.5,20.86
S$401
  Bottom 0.406: 117.92,37.37 120.15,35.15 126.18,35.15
S$402
  Bottom 0.406: E$54.5 115.07,17.37 112.95,17.35 112.98,33.91 113.48,33.88
S$403
  Bottom 0.406: 116.31,14.86 113.8,14.91 111.56,14.87 111.56,29.79 111.58,31.97 109.67,31.97 108.72,32.92 108.72,33.56 108.4,33.88
S$404
  Bottom 0.406: 124.55,21.92 124.55,21.39 123.69,20.53 121.03,20.53 119.11,22.45 116.34,22.45 116.3,22.41
S$405